# Altium PCB vp40_base_board.PcbDoc (part 5 of 5)
Units mil, origin at the board's own origin, x right, y up, seen from the top; angles counter-clockwise.
Board outline 8267.72 x 4330.71 mil, 4 copper layers (Top Layer, Internal Plane 1, Internal Plane 2, Bottom Layer), stack 30.635 mil thick; 531 components, 391 nets, 1969 pads, 1352 vias.
Unrouted connection lines stored in the file: 302.
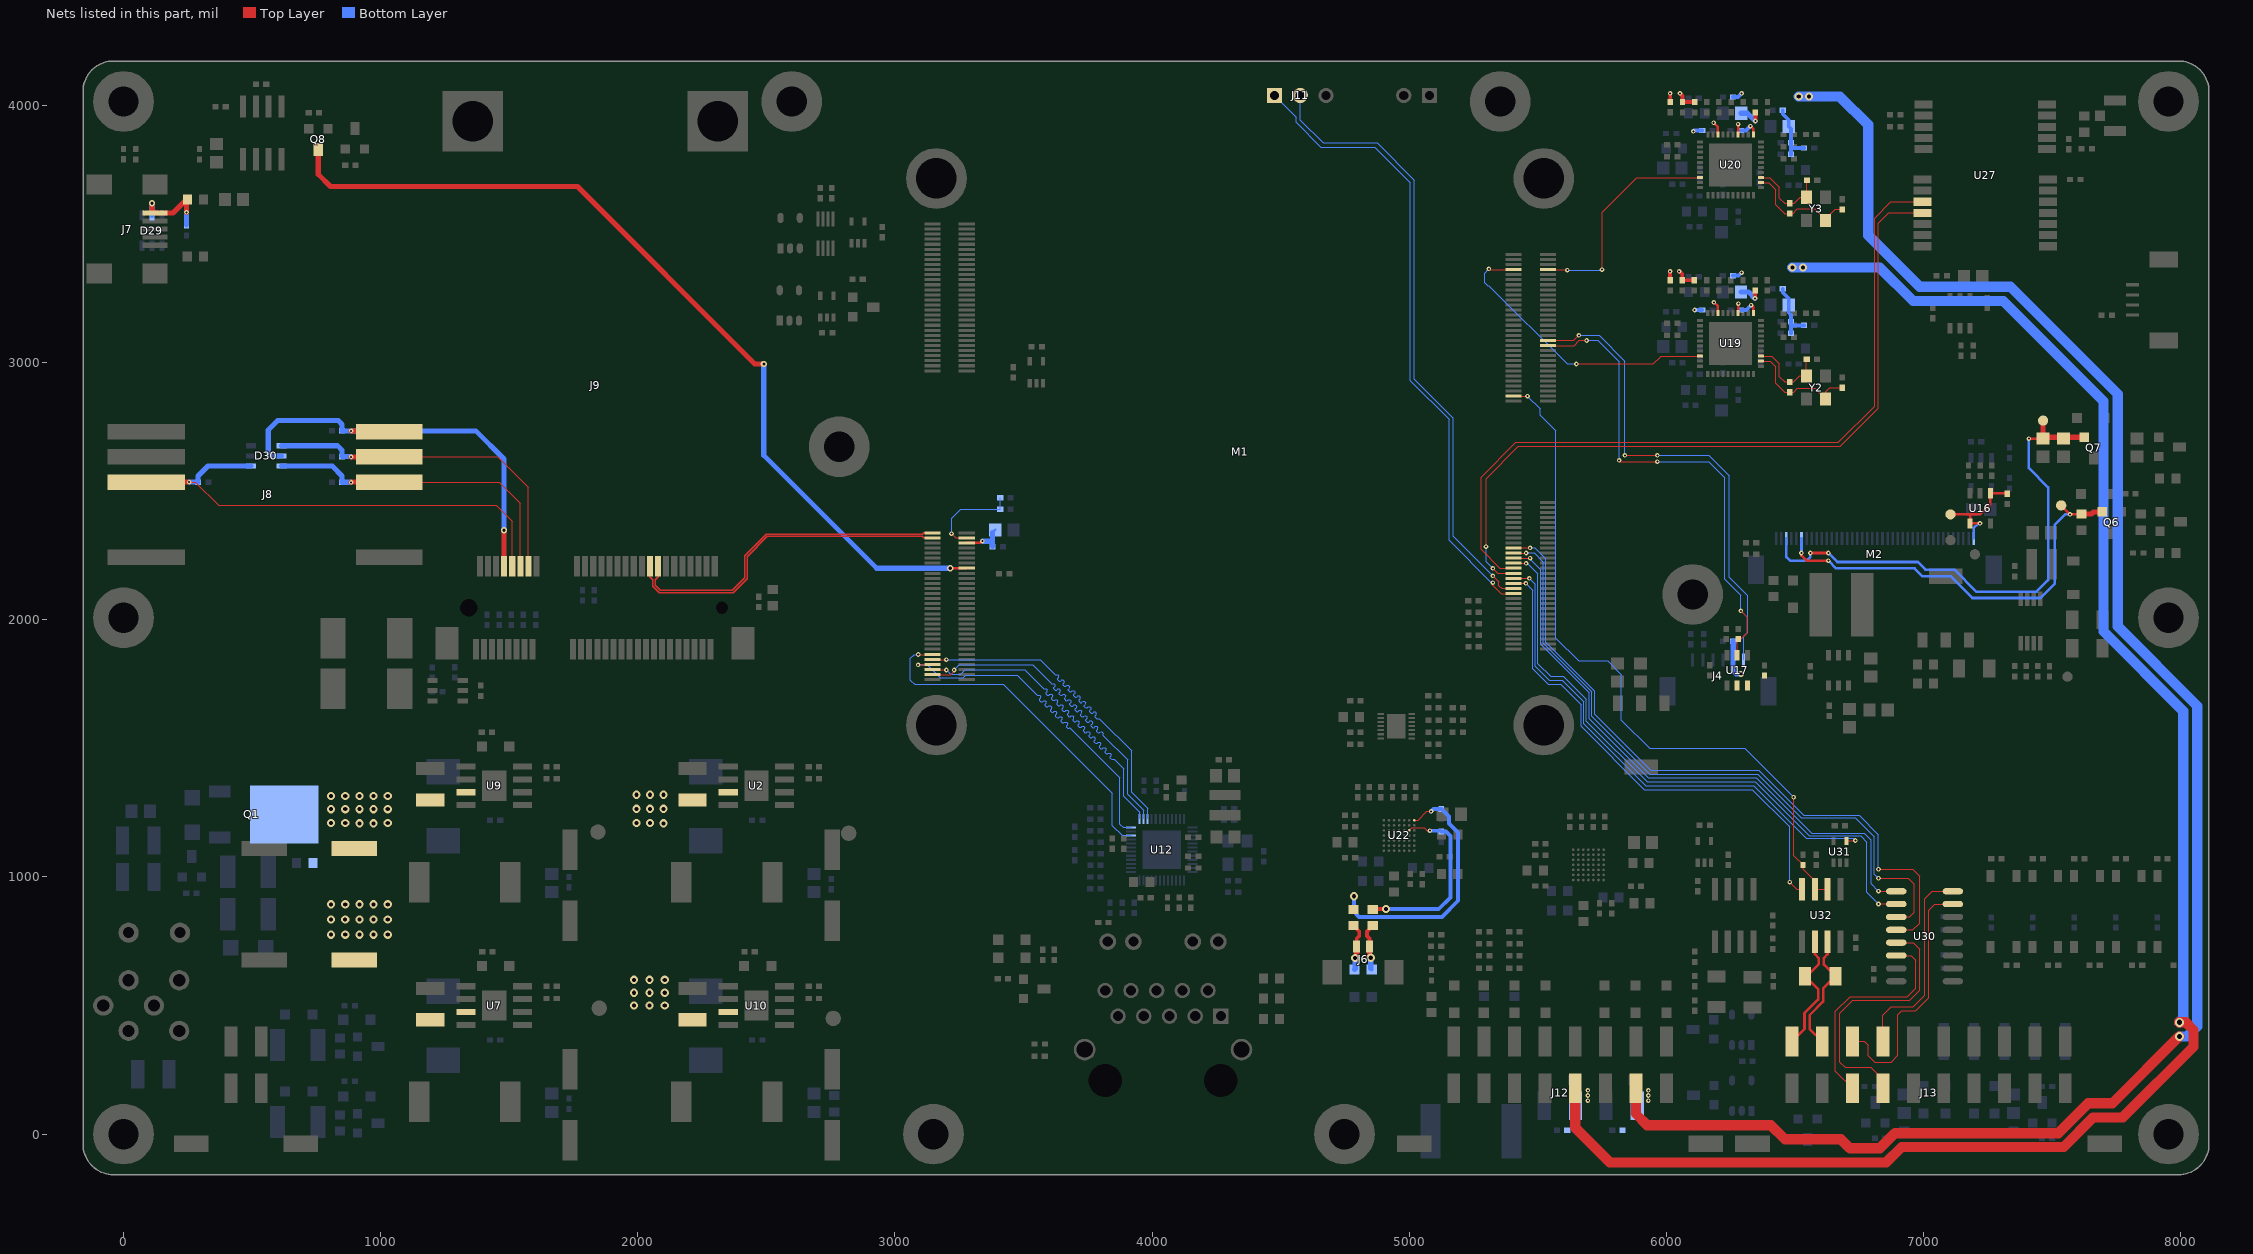
[diagram p7: the nets of this part, all layers, seen from the top]

## Via types
v1: diameter 18, hole 8, Top Layer to Bottom Layer, tented both sides, 481 vias
v2: diameter 18, hole 8, Top Layer to Bottom Layer, 376 vias
v3: diameter 32, hole 16, Top Layer to Bottom Layer, tented both sides, 202 vias
v4: diameter 24, hole 12, Top Layer to Bottom Layer, tented both sides, 182 vias
v5: diameter 24, hole 12, Top Layer to Bottom Layer, 65 vias
v6: diameter 32, hole 16, Top Layer to Bottom Layer, 34 vias
v7: diameter 32, hole 20, Top Layer to Bottom Layer, 7 vias
v8: diameter 32, hole 20, Top Layer to Bottom Layer, tented both sides, 3 vias
v9: diameter 35, hole 20, Top Layer to Bottom Layer, 2 vias

## Nets (pads, with @x,y where several pads share a name; then routed paths per layer and width w, separated by ;. In a path a pad name is that pad's centre, name@x,y a point inside that pad or via, vN(x,y) a via of type N, cw(c..) or ccw(c..) an arc to the next point about the centre after c; other vN are vias at no path point) (continued)
RGMII-TXD0: M1.C8 U12.36 | length 1368.2
  Top Layer w4.7: v1(3090,1825) 3147.44,1825 M1.C8@3145.67,1826.77
  Bottom Layer w4.7: v1(3090,1825) 3125.4,1825 3175.4,1775 3265,1775 3275,1785 3475,1785 3550,1710 3553.37,1706.63 3557.03,1706.63 3563.27,1706.63 3567.42,1702.48 3567.42,1696.24 3565.59,1694.41 3563.76,1692.58 3563.76,1686.34 3567.92,1682.18 3574.15,1682.18 3575.99,1684.01 3577.82,1685.85 3584.05,1685.85 3588.21,1681.69 3588.21,1675.45 3586.38,1673.62 3584.55,1671.79 3584.55,1665.55 3588.71,1661.39 3594.94,1661.39 3596.78,1663.22 3598.61,1665.06 3604.84,1665.06 3609,1660.9 3609,1654.66 3607.17,1652.83 3605.34,1651 3605.34,1644.76 3609.5,1640.6 3615.73,1640.6 3617.56,1642.44 3619.4,1644.27 3625.63,1644.27 3629.79,1640.11 3629.79,1633.87 3627.96,1632.04 3626.13,1630.21 3626.13,1623.97 3630.28,1619.82 3636.52,1619.82 3638.35,1621.65 3640.18,1623.48 3646.42,1623.48 3650.58,1619.32 3650.58,1613.08 3648.75,1611.25 3646.92,1609.42 3646.92,1603.18 3651.07,1599.03 3657.31,1599.03 3659.14,1600.86 3660.97,1602.69 3667.21,1602.69 3671.37,1598.53 3671.37,1592.3 3669.54,1590.46 3667.7,1588.63 3667.7,1582.4 3671.86,1578.24 3678.1,1578.24 3679.86,1580 3680,1580 3875,1385 3875,1205 3887.09,1192.91 U12.36@3918.3,1192.91
RGMII-TXD1: M1.C6 U12.37 | length 1364.3
  Top Layer w4.7: M1.C6@3145.67,1807.09 3147.76,1805 v1(3200,1805)
  Bottom Layer w4.7: v1(3200,1805) 3216.35,1788.65 3256.77,1788.65 3273.12,1805 3505,1805 3575,1735 3578.37,1731.63 3582.03,1731.63 3588.27,1731.63 3592.42,1727.48 3592.42,1721.24 3590.59,1719.41 3588.76,1717.58 3588.76,1711.34 3592.92,1707.18 3599.15,1707.18 3600.99,1709.01 3602.82,1710.85 3609.05,1710.85 3613.21,1706.69 3613.21,1700.45 3611.38,1698.62 3609.55,1696.79 3609.55,1690.55 3613.71,1686.39 3619.94,1686.39 3621.78,1688.22 3623.61,1690.06 3629.84,1690.06 3634,1685.9 3634,1679.66 3632.17,1677.83 3630.34,1676 3630.34,1669.76 3634.5,1665.6 3640.73,1665.6 3642.56,1667.44 3644.4,1669.27 3650.63,1669.27 3654.79,1665.11 3654.79,1658.87 3652.96,1657.04 3651.13,1655.21 3651.13,1648.97 3655.28,1644.82 3661.52,1644.82 3663.35,1646.65 3665.18,1648.48 3671.42,1648.48 3675.58,1644.32 3675.58,1638.08 3673.75,1636.25 3671.92,1634.42 3671.92,1628.18 3676.07,1624.03 3682.31,1624.03 3684.14,1625.86 3685.97,1627.69 3692.21,1627.69 3696.37,1623.53 3696.37,1617.3 3694.54,1615.46 3692.7,1613.63 3692.7,1607.4 3696.86,1603.24 3703.1,1603.24 3704.93,1605.07 3706.76,1606.9 3713,1606.9 3717.16,1602.74 3717.16,1596.51 3715.33,1594.67 3713.49,1592.84 3713.49,1586.61 3717.65,1582.45 3723.89,1582.45 3725.72,1584.28 3727.55,1586.11 3733.79,1586.11 3737.95,1581.95 3737.95,1575.72 3736.11,1573.89 3734.28,1572.05 3734.28,1565.82 3738.44,1561.66 3744.68,1561.66 3746.51,1563.49 3748.34,1565.32 3754.58,1565.32 3758.73,1561.16 3758.73,1554.93 3756.9,1553.1 3755.07,1551.27 3755.07,1545.03 3759.23,1540.87 3765.47,1540.87 3767.3,1542.7 3769.13,1544.53 3775.37,1544.53 3779.52,1540.38 3779.52,1534.14 3777.69,1532.31 3775.86,1530.48 3775.86,1524.24 3780.02,1520.08 3786.26,1520.08 3788.09,1521.91 3789.92,1523.74 3796.15,1523.74 3800.31,1519.59 3800.31,1513.35 3798.48,1511.52 3796.65,1509.69 3796.65,1503.45 3800.81,1499.29 3807.04,1499.29 3808.88,1501.12 3810.71,1502.96 3816.94,1502.96 3821.1,1498.8 3821.1,1492.56 3819.27,1490.73 3817.44,1488.9 3817.44,1482.66 3821.6,1478.5 3827.83,1478.5 3829.66,1480.34 3831.5,1482.17 3837.73,1482.17 3841.89,1478.01 3841.89,1471.77 3840.06,1469.94 3838.23,1468.11 3838.23,1461.87 3842.39,1457.72 3848.62,1457.72 3852.28,1457.72 3860,1450 3890,1420 3890,1313.3 3951.28,1252.02 U12.37@3951.28,1225.89
RGMII-TXD2: M1.C4 U12.38 | length 1366.2
  Top Layer w4.7: M1.C4@3145.67,1787.4 3217.4,1787.4 3230,1800 v1(3230,1805)
  Bottom Layer w4.7: v1(3230,1805) 3250,1825 3535,1825 3605,1755 3607.85,1752.15 3612.55,1752.15 3617.75,1752.15 3622.94,1746.96 3622.94,1741.76 3620.59,1739.41 3618.24,1737.06 3618.24,1731.86 3623.44,1726.66 3628.64,1726.66 3630.99,1729.01 3633.34,1731.36 3638.53,1731.36 3643.73,1726.17 3643.73,1720.97 3641.38,1718.62 3639.03,1716.27 3639.03,1711.07 3644.23,1705.87 3649.42,1705.87 3651.78,1708.22 3654.13,1710.58 3659.32,1710.58 3664.52,1705.38 3664.52,1700.18 3662.17,1697.83 3659.82,1695.48 3659.82,1690.28 3665.02,1685.08 3670.21,1685.08 3672.56,1687.44 3674.92,1689.79 3680.11,1689.79 3685.31,1684.59 3685.31,1679.39 3682.96,1677.04 3680.61,1674.69 3680.61,1669.49 3685.8,1664.3 3691,1664.3 3693.35,1666.65 3695.7,1669 3700.9,1669 3706.1,1663.8 3706.1,1658.6 3703.75,1656.25 3701.4,1653.9 3701.4,1648.7 3706.59,1643.51 3711.79,1643.51 3714.14,1645.86 3716.49,1648.21 3721.69,1648.21 3726.89,1643.01 3726.89,1637.81 3724.54,1635.46 3722.19,1633.11 3722.19,1627.92 3727.38,1622.72 3732.58,1622.72 3734.93,1625.07 3737.28,1627.42 3742.48,1627.42 3747.68,1622.22 3747.68,1617.03 3745.33,1614.67 3742.97,1612.32 3742.97,1607.13 3748.17,1601.93 3753.37,1601.93 3755.72,1604.28 3758.07,1606.63 3763.27,1606.63 3768.47,1601.43 3768.47,1596.24 3766.11,1593.89 3763.76,1591.53 3763.76,1586.34 3768.96,1581.14 3774.16,1581.14 3776.51,1583.49 3778.86,1585.84 3784.06,1585.84 3789.25,1580.65 3789.25,1575.45 3786.9,1573.1 3784.55,1570.75 3784.55,1565.55 3789.75,1560.35 3794.95,1560.35 3797.3,1562.7 3799.65,1565.05 3804.85,1565.05 3810.04,1559.86 3810.04,1554.66 3810.04,1549.96 3812.5,1547.5 3905,1455 3905,1322.02 3967.02,1260 U12.38@3967.02,1225.89
RGMII-TXD3: M1.C10 U12.39 | length 1363.3
  Top Layer w4.7: M1.C10@3145.67,1846.46 3147.13,1845 v1(3200,1845)
  Bottom Layer w4.7: v1(3200,1845) 3565,1845 3620,1790 3622.85,1787.15 3627.55,1787.15 3632.75,1787.15 3637.94,1781.96 3637.94,1776.76 3635.59,1774.41 3633.24,1772.06 3633.24,1766.86 3638.44,1761.66 3643.64,1761.66 3645.99,1764.01 3648.34,1766.36 3653.53,1766.36 3658.73,1761.17 3658.73,1755.97 3656.38,1753.62 3654.03,1751.27 3654.03,1746.07 3659.23,1740.87 3664.42,1740.87 3666.78,1743.22 3669.13,1745.58 3674.32,1745.58 3679.52,1740.38 3679.52,1735.18 3677.17,1732.83 3674.82,1730.48 3674.82,1725.28 3680.02,1720.08 3685.21,1720.08 3687.56,1722.44 3689.92,1724.79 3695.11,1724.79 3700.31,1719.59 3700.31,1714.39 3697.96,1712.04 3695.61,1709.69 3695.61,1704.49 3700.8,1699.3 3706,1699.3 3708.35,1701.65 3710.7,1704 3715.9,1704 3721.1,1698.8 3721.1,1693.6 3718.75,1691.25 3716.4,1688.9 3716.4,1683.7 3721.59,1678.51 3726.79,1678.51 3729.14,1680.86 3731.49,1683.21 3736.69,1683.21 3741.89,1678.01 3741.89,1672.81 3739.54,1670.46 3737.19,1668.11 3737.19,1662.92 3742.38,1657.72 3747.58,1657.72 3749.93,1660.07 3752.28,1662.42 3757.48,1662.42 3762.68,1657.22 3762.68,1652.03 3760.33,1649.67 3757.97,1647.32 3757.97,1642.13 3763.17,1636.93 3768.37,1636.93 3770.72,1639.28 3773.07,1641.63 3778.27,1641.63 3783.47,1636.43 3783.47,1631.24 3781.11,1628.89 3778.76,1626.53 3778.76,1621.34 3783.96,1616.14 3789.16,1616.14 3793.86,1616.14 3800,1610 3920,1490 3920,1330 3982.77,1267.23 U12.39@3982.77,1225.89
RGMII-TXEN: M1.C12 U12.34 | length 1360.5
  Top Layer w4.7: v1(3090.75,1865) 3144.53,1865 M1.C12@3145.67,1866.14 M1.C12@3146.81,1865
  Bottom Layer w4.7: v1(3090.75,1865) 3075,1865 3060,1850 3060,1765 3076.35,1748.65 3421.35,1748.65 3845,1325 3845,1200 3883.58,1161.42 U12.34@3918.3,1161.42
RS232A-RX: J13.8 U30.13 | length 1028.2
  Top Layer w4.7: J13.8@6842.52,178.35 6842.52,212.48 6795,260 6695.2,260 6675,280.2 6675,470 6725,520 6945.98,520 6985,559.02 6985,719.72 6960.24,744.49 U30.13@6894.17,744.49
RS232A-TX: J13.6 U30.14 | length 868.8
  Top Layer w4.7: J13.6@6724.41,178.35 6657.48,245.28 6657.48,477.48 6715,535 6937.44,535 6970,567.56 6970,676.25 6951.76,694.49 U30.14@6894.17,694.49
RS232B-RX: J13.7 U30.8 | length 792.9
  Top Layer w4.7: J13.7@6842.52,360.24 6842.52,462.52 6875,495 6959.87,495 7005,540.13 7005,914.49 7035,944.49 U30.8@7114.17,944.49
RS232B-TX: J13.5 U30.7 | length 993.2
  Top Layer w4.7: J13.5@6724.41,360.24 6769.76,360.24 6785,345 6785,305 6809.8,280.2 6874.38,280.2 6900,305.83 6900,465.13 6915,480.13 6970,480.13 7020,530.13 7020,870 7044.49,894.49 U30.7@7114.17,894.49
RS485_N: J13.3 R147.1 U32.7 | length 474.5
  Top Layer w10: J13.3@6606.3,360.24 6557.24,409.29 6557.24,462.24 6610,515 6610,566.69 R147.1@6657.48,614.17 6612.36,659.29 6612.36,684.72 6627.36,699.72 U32.7@6627.36,748.03
RS485_P: J13.1 R147.2 U32.6 | length 483.3
  Top Layer w10: J13.1@6488.19,360.24 6537.24,409.29 6537.24,470.53 6590,523.28 6590,563.54 R147.2@6539.37,614.17 6544.37,619.17 6551.54,619.17 6592.36,660 6592.36,684.72 6577.36,699.72 U32.6@6577.36,748.03
SIMCLK: C177.1 D30.6 J8.3 J9.12 | length 1249.1
  Top Layer w4.7: J8.3@1033.47,2535.43 1461.26,2535.43 1543.31,2453.39 J9.12@1543.31,2208.66
  Top Layer w20: v2(885,2535) 885,2535.43 J8.3@1033.47,2535.43
  Bottom Layer w20: D30.6@614.17,2598.43 811.57,2598.43 850.13,2559.87 C177.1@850.13,2535 v2(885,2535)
SIMDATA: C176.1 D30.1 J8.6 J9.10 | length 1942.9
  Top Layer w4.7: v2(255,2535.43) 279.57,2535.43 370,2445 1450,2445 1511.81,2383.19 J9.10@1511.81,2208.66
  Top Layer w20: J8.6@88.58,2535.43 v2(255,2535.43)
  Bottom Layer w20: v2(255,2535.43) 289.44,2535.43 C176.1@289.87,2535 289.87,2559.87 328.43,2598.43 D30.1@496.06,2598.43
SIMRST: C183.1 D30.4 J8.2 J9.14 | length 1348.8
  Top Layer w4.7: J8.2@1033.47,2633.86 1456.14,2633.86 1574.8,2515.2 J9.14@1574.8,2208.66
  Top Layer w20: v2(885,2633.86) J8.2@1033.47,2633.86
  Bottom Layer w20: D30.4@614.17,2677.17 832.83,2677.17 850.13,2659.87 C183.1@850.13,2635 883.86,2635 v2(885,2633.86)
SIMVCC: C178.1 D30.5 J8.1 J9.8 | length 1719.3
  Top Layer w20: v2(885,2735) 1030.75,2735 J8.1@1033.47,2732.28 ; v5(1480,2348.5) 1480.31,2348.19 J9.8@1480.31,2208.66
  Bottom Layer w20: D30.5@614.17,2637.8 575.2,2637.8 562.99,2650 562.99,2737.99 600,2775 835,2775 850.13,2759.87 C178.1@850.13,2735 1370,2735 1480,2625 v5(1480,2348.5)
SPK_N: L22.2 R104.2 U22.B3 | length 737.7
  Top Layer w3: U22.B3@5000,1181.11 5009.75,1190.85 5045,1190.85
  Top Layer w4.7: 5045,1190.85 5058.94,1190.85 5059.04,1190.74 ; 5059.15,1190.85 5070,1180 v1(5080,1180)
  Top Layer w15: L22.2@4858.27,874.02 4859.25,875 v3(4910,875)
  Bottom Layer w15: v3(4910,875) 5115,875 5160,920 5160,1160.36 5155,1165.36 5143,1177.35 R104.2@5125,1177.35 5122.35,1180 v1(5080,1180)
SPK_P: L23.2 R105.2 U22.A1 | length 1007.2
  Top Layer w4.7: U22.A1@5019.69,1220.48 5034.19,1220.48 5068.71,1255 v1(5085,1255)
  Bottom Layer w15: v3(4785,925) 4785,865 4805,845 5127.43,845 5190,907.57 5190,1172.79 5161.22,1201.57 5155,1207.78 5155,1235.05 5140.68,1249.37 5140.5,1249.37 R105.2@5125,1264.87 5094.87,1264.87 v1(5085,1255)
SPKF_N: D25.2 J6.1 L22.1 | length 188.2
  Top Layer w15: J6.1@4845,730 4845,760.73 4835.87,769.86 4835.87,788.62 L22.1@4858.27,811.02
  Top Layer w20: J6.1@4845,730 4845,691.3 v3(4850.21,686.09)
  Bottom Layer w15: D25.2@4850.21,643.89 D25.2@4854.33,639.76
  Bottom Layer w20: D25.2@4850.21,643.89 v3(4850.21,686.09)
SPKF_P: D26.2 J6.2 L23.1 | length 188.2
  Top Layer w15: L23.1@4783.46,811.02 4805.87,788.62 4805.87,770.81 4795.79,760.73 J6.2@4795.79,730
  Top Layer w20: v3(4789.87,685) 4795.79,690.91 J6.2@4795.79,730
  Bottom Layer w20: D26.2@4787.4,639.76 4789.87,642.24 v3(4789.87,685)
TOUCH-3V3: C70.1 C73.1 J4.2 U17.2 U17.3 | length 150.3
  Bottom Layer w20: J4.2@6259.84,1844.09 6259.84,1801.18 6271.02,1790 v5(6289.81,1790) ; J4.2@6260.28,1844.54 C73.1@6260.28,1917.32
TOUCH-PWR: M1.B23 R71.2 U17.5 | length 1890.7
  Top Layer w4.7: M1.B23@5539.37,3066.93 5642.21,3066.93 5661.89,3086.62 v2(5690,3086.62) ; v2(5816.5,2620) 5821.5,2615 v2(5965,2615) ; U17.5@6275.4,1862.2 6275.4,1920.88 R71.2@6279.53,1925.01 6290,1925.01 6314.69,1949.69 6314.69,2010.31 v2(6290,2035)
  Bottom Layer w4.7: v2(5690,3086.62) 5733.38,3086.62 5816.5,3003.5 v2(5816.5,2620) ; v2(5965,2615) 6164.59,2615 6227.82,2551.77 6227.82,2157.18 6290,2095 v2(6290,2035)
TOUCH-RST: J4.1 M1.B25 | length 1905.9
  Top Layer w4.7: M1.B25@5539.37,3086.61 5640.31,3086.61 v2(5660,3106.3) ; v2(5838.94,2640) v2(5965,2640)
  Bottom Layer w4.7: v2(5660,3106.3) 5738.7,3106.3 5838.94,3006.06 v2(5838.94,2640) ; v2(5965,2640) 6164.86,2640 6245,2559.86 6245,2165 6315,2095 6315,1950 6299.21,1934.21 J4.1@6299.21,1844.09
UART1-RXD: J11.2 M1.A26 | length 2410.3
  Top Layer w4.7: v2(5325,2171.3) 5348.94,2147.36 5348.94,2133.39 5360.27,2122.05 M1.A26@5405.51,2122.05
  Bottom Layer w4.7: J11.2@4576.38,4039.37 4576.38,3943.62 4665,3855 4875,3855 5020,3710 5020,2935 5170,2785 5170,2326.3 v2(5325,2171.3)
UART1-TXD: J11.1 M1.A24 | length 2475.9
  Top Layer w4.7: v2(5325,2145) 5325,2135 5357.64,2102.36 M1.A24@5405.51,2102.36
  Bottom Layer w4.7: J11.1@4476.38,4039.37 4476.38,4038.62 4560,3955 4560,3935 4656.8,3838.2 4866.8,3838.2 5005,3700 5005,2930 5155,2780 5155,2310 5320,2145 v2(5325,2145)
UART2-RTS: M1.B4 R148.1 U32.2 U32.3 | length 2766.9
  Top Layer w4.7: M1.B4@5405.51,2870.08 v2(5460,2870.08) ; v2(6495,1310) 6495,1083.3 R148.1@6531.5,1046.8 6531.5,1030.76 6577.36,984.89 U32.3@6577.36,952.76 U32.2@6627.36,952.76
  Bottom Layer w4.7: v2(5460,2870.08) 5508.95,2821.13 5508.95,2796.05 5570,2735 5570,1929.4 5659.4,1840 5771.18,1840 5825,1786.18 5825,1610 5935,1500 6305,1500 v2(6495,1310)
UART2-RXD: M1.A30 U31.4 | length 2022.6
  Top Layer w4.7: M1.A30@5405.51,2161.42 v2(5467.37,2161.42) ; U31.4@6700.8,1140.12 v2@6735,1140.12
  Bottom Layer w4.7: v2(5467.37,2161.42) 5490,2138.79 5490,1820 5545,1765 5595,1765 5679.4,1680.6 5679.4,1595.6 5920,1355 6340,1355 6545,1150 6726.73,1150 v2(6735,1141.73)
UART2-TXD: M1.A28 U32.4 | length 2004
  Top Layer w4.7: M1.A28@5405.51,2141.73 v2(5453.94,2141.73) ; v2(6480,980) 6507.24,952.76 U32.4@6527.36,952.76 U32.4@6527.36,987.64
  Bottom Layer w4.7: v2(5453.94,2141.73) 5480,2115.67 5480,1810 5540,1750 5590,1750 5669.7,1670.3 5669.7,1585.3 5915,1340 6335,1340 6480,1195 v2(6480,980)
UART3-RXD: M1.A34 U27.20 | length 3025.4
  Top Layer w4.7: M1.A34@5405.51,2200.79 5352.87,2200.79 5280,2273.66 5280,2555 5415,2690 6669.21,2690 6810,2830.79 6810,3562.48 6873.5,3625.98 U27.20@6996.18,3625.98
UART3-TXD: M1.A32 U27.21 | length 2994.9
  Top Layer w4.7: v2(5298.7,2285) 5298.7,2548.7 5425,2675 6676.21,2675 6825,2823.79 6825,3542.88 6864.8,3582.68 U27.21@6996.18,3582.68 ; v2(5325,2200) 5343.9,2181.1 M1.A32@5405.51,2181.1
  Bottom Layer w4.7: v2(5298.7,2285) 5298.7,2226.3 v2(5325,2200)
UART4-RXD: M1.A42 U30.12 | length 2713.9
  Top Layer w4.7: M1.A42@5405.51,2279.53 5469.53,2279.53 v2(5470,2280) ; v2(6825,1030) 6958.15,1030 6985,1003.15 6985,821.02 6958.46,794.49 U30.12@6894.17,794.49
  Bottom Layer w4.7: v2(5470,2280) 5488.62,2280 5531.2,2237.42 5531.2,1913.33 5720,1724.53 5720,1635 5940,1415 6360,1415 6535,1240 6750,1240 6825,1165 v2(6825,1030)
UART4-TXD: M1.A40 U30.11 | length 2605.4
  Top Layer w4.7: M1.A40@5405.51,2259.84 5454.84,2259.84 v2(5455,2260) ; v2(6825,995) 6941.25,995 6965,971.25 6965,863.24 6946.25,844.49 U30.11@6894.17,844.49
  Bottom Layer w4.7: v2(5455,2260) 5485.47,2260 5521.5,2223.97 5521.5,1909.31 5710,1720.81 5710,1625 5935,1400 6355,1400 6525,1230 6735,1230 6808.65,1156.35 6808.65,1011.35 v2(6825,995)
UART5-RXD: M1.A38 U30.9 | length 2361
  Top Layer w4.7: M1.A38@5405.51,2240.16 5469.84,2240.16 v2(5470,2240) ; v2(6825,945) 6890.96,945 6892.31,946.35 U30.9@6894.17,944.49
  Bottom Layer w4.7: v2(5470,2240) 5467.53,2240 5467.45,2239.92 5511.8,2195.57 5511.8,1905.29 5700,1717.09 5700,1615 5930,1385 6350,1385 6565,1170 6770,1170 6795,1145 6795,975 v2(6825,945)
UART5-TXD: M1.A36 U30.10 | length 2398.5
  Top Layer w4.7: M1.A36@5415.04,2220 v2(5455,2220) ; v2(6825,895) 6893.66,895 U30.10@6894.17,894.49
  Bottom Layer w4.7: v2(5455,2220) 5459.05,2220 v2@5460,2220.95 ; v2@5459.53,2220.47 5500,2180 5500,1830 5550,1780 5600,1780 5689.1,1690.9 5689.1,1605.9 5925,1370 6345,1370 6555,1160 6755.39,1160 6780,1135.39 6780,940 v2(6825,895)
USB-H1-OC: M1.C57 R29.1 R30.1 | length 375.6
  Top Layer w4.7: v2(3220,2335) 3236.1,2318.9 M1.C57@3279.53,2318.9
  Bottom Layer w4.7: v2(3220,2335) 3220,2395 3255,2430 R30.1@3409.87,2430 R29.1@3409.87,2475
USB-H1-VBUS: C32.1 M1.C55 R31.1 | length 171.5
  Top Layer w10: M1.C55@3279.53,2299.21 3333.39,2299.21 v1(3340,2305.83)
  Bottom Layer w10: C32.1@3379.87,2339.87 C32.1@3390,2350
  Bottom Layer w20: v1(3340,2305.83) 3379.05,2305.83 ; R31.1@3379.87,2285 C32.1@3379.87,2339.87
USB-HOST_N: J9.36 M1.C58 | length 1322.7
  Top Layer w5.3: J9.36@2047.24,2208.66 2047.24,2166.64 2058.49,2155.39 2058.49,2131.27 2083.76,2106 2371,2106 2425,2160 2425,2246 2503.24,2324.24 3106.18,2324.24 3111.52,2318.9 M1.C58@3145.67,2318.9
USB-HOST_P: J9.38 M1.C60 | length 1307.8
  Top Layer w5.3: J9.38@2078.74,2208.66 2078.74,2166.64 2067.49,2155.39 2067.49,2135 2087.49,2115 2367.27,2115 2416,2163.73 2416,2249.73 2499.51,2333.24 3106.18,2333.24 3111.52,2338.58 M1.C60@3145.67,2338.58
USB-OTG-VBUS: M1.C45 Q8.3 | length 3460.6
  Top Layer w10: v5(3215,2200.79) M1.C45@3279.53,2200.79
  Top Layer w20: Q8.3@757.28,3829.45 757.28,3732.72 805,3685 1765,3685 2455,2995 v5(2490,2995)
  Bottom Layer w20: v5(2490,2995) 2490,2640 2929.21,2200.79 v5@3213.2,2200.79 ; v5@3214.1,2200.79 v5(3215,2200.79)
VADC1-INT: M1.B54 U19.38 | length 1138.6
  Top Layer w4.7: v1(5310,3365) 5312.8,3362.2 M1.B54@5405.51,3362.2 ; v1(5650,2995) 5949.41,2995 5980,3025.59 U19.38@6131.45,3025.59
  Bottom Layer w4.7: v1(5310,3365) 5293.65,3348.65 5293.65,3311.35 5305,3300 5310,3300 5615,2995 v1(5650,2995)
VADC1-X1: C103.2 R83.2 U19.13 Y2.3 | length 322.6
  Top Layer w4.7: U19.13@6367.67,3025.59 6409.41,3025.59 6440,2995 6440,2945 6459.61,2925.39 R83.2@6479.87,2925.39 6495.39,2925.39 6518.83,2948.83 Y2.3@6544.84,2948.83 6544.84,3012.19 C103.2@6545.92,3013.27
VADC1-X2: C104.2 R83.1 U19.12 Y2.1 | length 463
  Top Layer w4.7: U19.12@6367.67,3005.91 6404.09,3005.91 6425,2985 6425,2920 6459.61,2885.39 R83.1@6479.87,2885.39 6495.39,2885.39 6510,2900 6577.91,2900 Y2.1@6619.64,2858.27 6619.64,2887.28 6635.21,2902.85 C104.2@6683.91,2902.85
VADC2-INT: M1.B53 U20.38 | length 872.9
  Top Layer w4.7: M1.B53@5539.37,3362.2 5612.83,3362.2 v1(5615,3360) ; v1(5750,3362.21) 5750,3585 5885.2,3720.2 U20.38@6131.57,3720.2
  Bottom Layer w4.7: v1(5615,3360) 5747.79,3360 v1(5750,3362.21)
VADC2-X1: C134.2 R92.2 U20.13 Y3.3 | length 321.2
  Top Layer w4.7: U20.13@6367.8,3720.2 6402.69,3720.2 6440,3682.89 6440,3640 6460,3620 R92.2@6480,3620 6496.48,3620 6519.92,3643.44 Y3.3@6544.96,3643.44 6546.74,3645.22 C134.2@6546.74,3710.36
VADC2-X2: C133.2 R92.1 U20.12 Y3.1 | length 447.1
  Top Layer w4.7: U20.12@6367.8,3700.52 6397.32,3700.52 6425,3672.84 6425,3615 6460,3580 R92.1@6480,3580 6491.61,3580 6509.69,3598.08 6576.61,3598.08 Y3.1@6619.76,3554.92 ; Y3.1@6619.76,3552.88 Y3.1@6619.76,3554.92 ; C133.2@6684.72,3596 6657.48,3596 6619.76,3558.28 Y3.1@6619.76,3554.92
VBAT: C5.1 C6.1 C7.1 C10.1 C15.1 C22.1 C23.1 Q1.3 U2.7 U7.7 U9.7 U10.7
  other v3: 1985,500 2045,500 2105,500 1985,550 2045,550 2105,550 1985,600 2045,600 2105,600 807.09,775.59 862.2,775.59 917.32,775.59 972.44,775.59 1027.56,775.59 807.09,834.46 862.02,834.65 917.32,834.46 972.44,834.65 1027.56,834.46 807.09,893.7 862.2,893.7 917.32,893.7 972.44,893.7 1027.56,893.7 917.32,1208.66 972.44,1208.66 2100,1208.66 807.09,1209.45 862.2,1209.45 1027.56,1209.45 1995,1210 2047.24,1210 807.09,1263.78 862.2,1263.78 917.32,1263.78 972.44,1263.78 1027.56,1263.78 1995,1265 2047.24,1265 2100,1265 807.09,1314.96 862.2,1314.96 917.32,1314.96 972.44,1314.96 1027.56,1314.96 1995,1320 2047.24,1320 2100,1320
VBUSF: C171.2 D29.5 J7.1 L29.2 | length 338.6
  Top Layer w20: v5(110.63,3620) 110.63,3594.09 J7.1@122.05,3582.68 192.68,3582.68 245,3635 L29.2@248.5,3635 245,3631.5 v2(245,3585)
  Bottom Layer w20: D29.5@110.63,3573.11 v5(110.63,3620) ; C171.2@245,3534.87 v2(245,3585)
VCOM: C68.1 M2.1 pad.@7105,2410 U16.1 U16.4 | length 427.5
  Top Layer w10: pad.@7105,2410 7181.1,2410 ; v1(7220,2375) 7182.09,2375 U16.4@7181.1,2374.02 7181.1,2410 ; C68.1@7325,2490.13 7323,2492.13 U16.1@7259.84,2492.13 7259.84,2449.84 7220,2410 7181.1,2410
  Bottom Layer w10: M2.1@7194.88,2316.54 7194.88,2356.3 7213.58,2375 v1(7220,2375)
VGH: C54.1 C55.1 M2.38 pad.@7465,2775 Q7.3 | length 2066.6
  Top Layer w10: v1(6560,2260) v1(6630,2260) ; v1(7410,2705) C55.1@7465,2705
  Top Layer w20: pad.@7465,2775 C55.1@7465,2705 7470,2710 Q7.3@7625,2710
  Bottom Layer w10: M2.38@6466.54,2316.54 6466.54,2244.53 6481.06,2230 6545,2230 6560,2245 v1(6560,2260) ; v1(6630,2260) 6665,2225 6977.91,2225 7007.91,2195 7120,2195 7205,2110 7440,2110 7485,2155 7485,2515 7410,2590 v1(7410,2705)
VGL: C52.2 M2.35 pad.@7535.43,2445 Q6.3 | length 1627
  Top Layer w10: v1(6525,2260) 6525,2250 6545,2230 v1(6630,2230) ; pad.@7535.43,2445 7570,2410.43 v1(7570,2410) 7571.5,2411.5 C52.2@7615,2411.5
  Top Layer w20: C52.2@7615,2411.5 7652.92,2411.5 7661.43,2420 Q6.3@7695,2420
  Bottom Layer w10: v1@6525.59,2260 M2.35@6525.59,2316.54 ; v1(6630,2230) 6660,2200 6965,2200 6995,2170 7105,2170 7190,2085 7455,2085 7510,2140 7510,2368.82 7551.18,2410 v1(7570,2410)
VGND1: C82.2 C83.2 C87.2 C88.2 C96.1 C98.1 C211.2 C213.2 J12.10 R77.1 R84.1 U19.21 U19.24 U19.28 | length 7361.3
  Top Layer w10: v1(6185,3235) 6200.35,3219.65 U19.28@6200.35,3192.91 ; U19.24@6279.09,3192.91 6279.09,3229.09 v1(6280,3230) ; v1(6330,3224.06) 6338.14,3215.92 U19.21@6338.14,3192.91
  Top Layer w15: R84.1@6014.62,3320.8 6014.62,3354.62 v1(6015,3355) ; v1(6050,3355) 6051.86,3355 6061.86,3345 C87.2@6061.86,3320.55 C88.2@6109.1,3320.55 ; v1(6345,3250) 6345.33,3250.33 R77.1@6345.33,3280.55
  Top Layer w40: J12.10@5645.67,178.35 5645.67,24.33 5780,-110 6855,-110 6915,-50 7545,-50 7660,65 7775,65 8050,340 8050,405 8020,435 v9(7995,435)
  Bottom Layer w15: v1(6110,3205) C98.1@6139.87,3205 ; C82.2@6259.59,3338.58 6281.45,3338.58 v1(6292.87,3350) ; C96.1@6290.13,3205 6310.94,3205 v1(6330,3224.06)
  Bottom Layer w20: C83.2@6290.9,3275.59 6319.41,3275.59 v1(6345,3250)
  Bottom Layer w40: v6(6490,3370) v6(6531.5,3370) 6830,3370 6960,3240 7310,3240 7700,2850 7700,1955 8010,1645 8010,450 v9(7995,435)
  other v2: 5695,130 5695,150 5695,170
VGND2: C112.2 C113.2 C117.2 C118.2 C126.1 C128.1 C214.2 C216.2 J12.14 R87.1 R93.1 U20.21 U20.24 U20.28 | length 7560.8
  Top Layer w10: v1(6183.84,3933.2) 6200.47,3916.57 U20.28@6200.47,3887.53 ; v1(6279.09,3927.76) 6279.21,3927.64 U20.24@6279.21,3887.53 ; v1(6326.94,3920) 6338.27,3908.67 U20.21@6338.27,3887.53
  Top Layer w15: R93.1@6015.43,4013.95 v1@6015.43,4046.83 ; v1(6053.11,4047.26) 6062.68,4037.7 C118.2@6062.68,4013.7 C117.2@6109.92,4013.7 ; v1(6346.14,3940) R87.1@6346.14,3973.7
  Top Layer w40: J12.14@5881.89,178.35 5881.89,78.11 5925,35 6406.38,35 6461.38,-20 6679,-20 6714,-55 6830,-55 6888.94,3.94 7523.94,3.94 7640,120 7735,120 v9(7995,380)
  Bottom Layer w15: v1(6105,3900) 6108.2,3903.2 C128.1@6139.56,3903.2 ; C112.2@6259.72,4033.2 6278.8,4033.2 v1(6292.87,4047.26) ; C126.1@6289.81,3903.2 6310.14,3903.2 v1(6326.94,3920)
  Bottom Layer w20: C113.2@6291.02,3970.2 6315.94,3970.2 v1(6346.14,3940)
  Bottom Layer w40: v6(6515.13,4035) 6675,4035 6785,3925 6785,3495 6985,3295 7338.31,3295 7755,2878.31 7755,1975 8065,1665 8065,420 8025,380 v9(7995,380)
  other v1: 6015,4047.26
  other v2: 5930,130 5930,150 5930,170
  other v6: 6555,4035
VPLLGND1: C80.2 C81.2 C95.1 C97.1 R85.1 | length 235.7
  Bottom Layer w15: C80.2@6452.5,3287.4 6452.5,3272.5 6475.94,3249.06 C81.2@6475.94,3224.41 6475.94,3194.19 6485.13,3185 C97.1@6485.13,3160 6485.13,3145 ; C95.1@6485.13,3115 6485.13,3145 ; R85.1@6534.87,3145 6485.13,3145
VPLLGND2: C110.2 C111.2 C125.1 C127.1 R94.1 | length 235.2
  Bottom Layer w15: C110.2@6452.63,3982.02 6452.63,3967.37 6476.06,3943.94 C111.2@6476.06,3919.02 6485.13,3909.96 C127.1@6485.13,3855 6485.13,3835 ; C125.1@6485.13,3810 6485.13,3835 ; R94.1@6534.87,3835 6485.13,3835
pads on no net: D29.6 D30.3 J3.H1 J3.H2 J8. J8.5 J9.6 J9.7 J9.11 J9.13 J9.16 J9.17 J9.19 J9.23 J9.25 J9.28 J9.30 J9.31 J9.32 J9.33 J9.44 J9.45 J9.46 J9.47 J9.48 J9.49 J9.51 J9.@1358.27,3938.98 J9.@2311.02,3938.98 J9.H1 J9.H2 J12.9 J13.18 M1. M1.A14 M1.A15 M1.A46 M1.A54 M1.B1 M1.B3 M1.B5 M1.B6 M1.B7 M1.B8 M1.B9 M1.B10 M1.B11 M1.B12 M1.B13 M1.B14 M1.B15 M1.B16 M1.B17 M1.B18 M1.B19 M1.B20 M1.B21 M1.B22 M1.B24 M1.B26 M1.B28 M1.C1 M1.C3 M1.C5 M1.C7 M1.C9 M1.C11 M1.C13 M1.C15 M1.C17 M1.C19 M1.C21 M1.C23 M1.C25 M1.C26 M1.C27 M1.C29 M1.C31 M1.C33 M1.C35 M1.C40 M1.C42 M1.C44 M1.C46 M1.C48 M1.C50 M1.C59 M1.D19 M1.D34 M1.D36 M1.D38 M1.D40 M1.D42 M1.D44 M1.D46 M1.D48 M2.4 M2.5 M2.6 M2.23 M2.24 M2.26 M2.27 M2.28 M2.33 M2.34 M2.36 U2.2 U2.3 U2.5 U4.1 U6.1 U7.2 U7.3 U8.3 U9.2 U9.3 U10.2 U10.3 U12.22 U12.42 U12.43 U12.45 U12.46 U19.2 U20.2 U22.A4 U22.A5 U22.D5 U22.E3 U22.E4 U22.E5 U22.E6 U22.E7 U22.F4 U22.F5 U22.F6 U22.F7 U22.G1 U22.G6 U23.A1 U23.A4 U23.B2 U23.B3 U23.C3 U23.C4 U23.D4 U23.D5 U23.E3 U23.E4 U23.E5 U23.E6 U23.E7 U23.F4 U23.F5 U23.F6 U23.F7 U23.G1 U23.G6 U24.2 U24.8 U27.1 U27.2 U27.3 U27.4 U27.5 U27.6 U27.16 U27.17 U27.18 U27.19 U27.22 U37.1 U39.1 Y1.2 Y1.4 Y2.2 Y2.4 Y3.2 Y3.4
copper on no net:
  other v1: 7420,3917.32

## Polygon pours and split planes (outlines as drawn)
BL-LED+ on Bottom Layer "Top Layer-No Net" (solid, remove dead copper, pour order 75): 6427.17,2345 6445.13,2345 6450,2345 6455,2340 6455,2195 6450,2190 6419.96,2190 6414.69,2195.28 6414.69,2339.69 6420,2345
NetD3_1 on Bottom Layer "Top Layer-No Net" (solid, remove dead copper, pour order 60): 523.62,929.13 594.49,929.13 602.36,929.13 610.24,921.26 610.24,692.91 602.36,685.04 511.81,685.04 503.94,692.91 503.94,921.26 511.81,929.13
NetQ2_2 on Bottom Layer "Top Layer-No Net" (solid, remove dead copper, pour order 59): 20 vertices, not listed, extent 271.65,787.4 444.88,1035.43
NetD2_2 on Bottom Layer "Top Layer-No Net" (solid, remove dead copper, pour order 58): 18 vertices, not listed, extent 208.66,940.94 437.01,1220.47
NetC2_1 on Bottom Layer "Top Layer-No Net" (solid, remove dead copper, pour order 57): 31 vertices, not listed, extent -35.43,724.41 437.01,1374.2
PWRIN on Bottom Layer "Top Layer-No Net" (solid, remove dead copper, pour order 56): -15.75,452.76 19.68,452.76 70.87,452.76 98.43,425.2 98.43,232.28 98.43,165.35 86.61,153.54 -47.24,153.54 -59.06,165.35 -59.06,429.13 -35.43,452.76
VBAT on Bottom Layer "Top Layer-No Net" (solid, remove dead copper, pour order 63): 606.3,1374.2 606.49,1374.02 944.88,1374.02 1035.43,1374.02 1055.12,1354.33 1055.12,1043.31 1035.43,1023.62 720.47,1023.62 708.66,1035.43 708.66,1098.43 692.91,1114.17 492.13,1114.17 472.44,1133.86 472.44,1354.33 492.13,1374.02
NetC21_1 on Bottom Layer "Top Layer-No Net" (solid, remove dead copper, pour order 66): 1244.09,1244.09 1389.76,1244.09 1425.2,1244.09 1433.07,1236.22 1433.07,881.89 1413.39,862.2 1122.05,862.2 1098.42,885.83 1098.43,1228.35 1114.17,1244.09
NetC14_1 on Bottom Layer "Top Layer-No Net" (solid, remove dead copper, pour order 77): 1265,390 1400,390 1430,390 1435,385 1435,40 1415,20 1120,20 1098.42,41.57 1098.42,368.43 1120,390
NetD1_1 on Bottom Layer "Top Layer-No Net" (solid, remove dead copper, pour order 81): 33 vertices, not listed, extent -35,550 305,850
NetC9_1 on Bottom Layer "Top Layer-No Net" (solid, remove dead copper, pour order 85): 2250,1245 2430,1245 2441.22,1245 2450,1236.22 2450,880 2435,865 2150,865 2135,880 2135,1230 2150,1245
NetC20_1 on Bottom Layer "Top Layer-No Net" (solid, remove dead copper, pour order 91): 2265,390 2440,390 2450,380 2450,40 2430,20 2125,20 2105,40 2105,370 2125,390
LCD-2V5 on Bottom Layer "Top Layer-No Net" (solid, remove dead copper, pour order 95): 19 vertices, not listed, extent 7150,2280 7220,2540
P3V3 on Bottom Layer "Top Layer-No Net" (solid, remove dead copper, pour order 96): 7170,2600 7195,2600 7195,2600.12 7199.88,2605 7199.88,2715 7194.88,2720 7115,2720 7110,2715 7110,2605 7115,2600
12V-CAM on Bottom Layer "Top Layer-No Net 1" (solid, remove dead copper, pour order 103): 5095,-130 4978.74,-130 4935,-130 4915,-110 4915,188.66 4935,208.66 4936.34,210 5095,210
CAM1-PWR on Bottom Layer "Top Layer-No Net 1" (solid, remove dead copper, pour order 104): 19 vertices, not listed, extent 5340,-130 5585,250
CAM1-PWR on Bottom Layer "Top Layer-No Net 1" (solid, remove dead copper, pour order 106): 18 vertices, not listed, extent 5530,-130 5816.5,250
VGND1 on Bottom Layer "Top Layer-No Net 1" (solid, remove dead copper, pour order 108): 5645,180 5700,180 5705,175 5710,170 5710,5 5700,-5 5610,-5 5605,0 5605,170 5615,180
VGND2 on Bottom Layer "Top Layer-No Net 1" (solid, remove dead copper, pour order 109): 5880.2,180 5925,180 5930,180 5940,170 5940,5 5930,-5 5838.94,-5 5830,3.94 5830,35 5840,45 5840,82.68 5840,110 5840,175 5845,180
NetD34_1 on Bottom Layer "Top Layer-No Net 1" (solid, remove dead copper, pour order 113): 7078.3,110 7105,110 7125,110 7130,105 7130,70.6 7130,55 7125,50 7060,50 7050,50 7045,55 7045,95 7060,110
NetD37_1 on Bottom Layer "Top Layer-No Net 1" (solid, remove dead copper, pour order 115): 7165,110 7220,110 7225,105 7225,78.94 7225,55 7220,50 7150,50 7145,55 7145,105 7150,110
VGND1 on Top Layer "Top Layer-No Net 1" (solid, remove dead copper, pour order 68): 5633.72,180 5693.65,180 5705,180 5710,175 5710,120 5705,115 5610,115 5605,120 5605,175.31 5609.69,180
P3V3 on Top Layer "Top Layer-No Net 1" (solid, remove dead copper, pour order 79): 1310,1700 1360,1700 1380,1720 1456.14,1720 1605,1720 1615,1710 1615,1630 1603.12,1618.12 1285.97,1618.12 1279.09,1625 1279.09,1691.69 1287.4,1700
CELL-3V3 on Top Layer "Top Layer-No Net 1" (solid, remove dead copper, pour order 76): 19 vertices, not listed, extent 915,1618.12 1235,2140
OTGVBUS on Top Layer "Top Layer-No Net 1" (solid, remove dead copper, pour order 73): 25 vertices, not listed, extent 275,3595 480,3845
OTG-SH-GND on Top Layer "Top Layer-No Net 1" (solid, remove dead copper, pour order 70): 20 vertices, not listed, extent -120,3263.78 192.68,3795
NetD19_2 on Top Layer "Top Layer-No Net" (solid, pour order 94): 25 vertices, not listed, extent 7450,2045 7820,2280
P3V3 on Top Layer "Top Layer-No Net" (solid, remove dead copper, pour order 92): 7405,2045 7440,2045 7440,2127.05 7440,2135.94 7454.72,2150.67 7454.72,2450.28 7445,2460 7385,2460 7380,2455 7380,2156.73 7395,2141.73 7395,2045
AVDD on Top Layer "Top Layer-No Net" (solid, remove dead copper, pour order 90): 33 vertices, not listed, extent 7005,1755 7180,2235
P5V0 on Top Layer "Top Layer-No Net" (solid, remove dead copper, pour order 86): 6736.46,2200.79 6807.09,2200.79 6874.21,2200.79 6885,2190 6885,1835 6875,1825 6705,1825 6695,1835 6695,1915 6705,1925 6705,2190.79 6715,2200.79
NetD20_1 on Top Layer "Top Layer-No Net" (solid, remove dead copper, pour order 84): 30 vertices, not listed, extent 6459.61,1835 6675,2200.79
BL-LED+ on Top Layer "Top Layer-No Net" (solid, remove dead copper, pour order 80): 6425,2275 6456.19,2275 6456.19,2209.6 6465,2200.79 6525,2200.79 6525,2120 6392.57,2120 6392.57,2187.88 6414.69,2210 6414.69,2274.69 6415,2275
ETH-SH-GND on Top Layer "Top Layer-No Net" (solid, remove dead copper, pour order 74): 3765,400 4110,400 4385,400 4400,385 4400,290 4385,275 4315,275 4300,290 3775,290 3760,275 3715,275 3585,275 3575,285 3575,390 3585,400
P3V3 on Top Layer "Top Layer-No Net" (solid, remove dead copper, pour order 71): 3110,3115 3345,3115 3360,3115 3370,3105 3370,3050 3360,3040 3065,3040 3055,3050 3055,3105 3065,3115
CPU-3V3 on Top Layer "Top Layer-No Net" (solid, remove dead copper, pour order 67): 3095,3030 3360,3030 3370,3020 3370,2895 3360,2885 3065,2885 3055,2895 3055,3020 3065,3030
GND on Top Layer "Top Layer-No Net" (solid, remove dead copper, pour order 65): 29 vertices, not listed, extent -125,270 740,1350
PWRIN on Top Layer "Top Layer-No Net" (solid, remove dead copper, pour order 62): 17 vertices, not listed, extent -59.06,55.12 456.69,452.76
VBAT on Top Layer "Top Layer-No Net" (solid, remove dead copper, pour order 61): 30 vertices, not listed, extent 767.72,307.09 1377.95,1350.39
NetC21_1 on Top Layer "Top Layer-No Net" (solid, remove dead copper, pour order 64): 17 vertices, not listed, extent 1080,834.46 1377.95,1291.34
P3V3 on Top Layer "Top Layer-No Net" (solid, remove dead copper, pour order 69): 25 vertices, not listed, extent 1417.32,834.46 1889.76,1401.57
NetC14_1 on Top Layer "Top Layer-No Net" (solid, remove dead copper, pour order 72): 1300,440 1355,440 1371.02,440 1377.95,433.07 1377.95,12.95 1365,0 1095,0 1080,15 1080,265 1095,280 1245,280 1290,325 1290,405 1290,435 1295,440
P5V0 on Top Layer "Top Layer-No Net" (solid, remove dead copper, pour order 78): 27 vertices, not listed, extent 1417.32,0 1915,550
VBAT on Top Layer "Top Layer-No Net" (solid, remove dead copper, pour order 82): 2110,1350.39 2389.61,1350.39 2390,1350 2395,1350 2395,1345 2395,1315 2390,1310 2305,1310 2290,1295 2290,1179.29 2280,1169.29 1971.81,1169.29 1960,1181.1 1960,1335.39 1975,1350.39
NetC9_1 on Top Layer "Top Layer-No Net" (solid, remove dead copper, pour order 83): 2330,1295 2385,1295 2395,1295 2405,1285 2405,850 2390,835 2055,835 2045,845 2045,1135 2055.67,1145.67 2281.69,1145.67 2311.02,1175 2311.02,1286.02 2320,1295
CPU-3V3 on Top Layer "Top Layer-No Net" (solid, remove dead copper, pour order 87): 24 vertices, not listed, extent 2435,834.46 2855,1400
VBAT on Top Layer "Top Layer-No Net" (solid, remove dead copper, pour order 88): 20 vertices, not listed, extent 1960,385 2395,625
NetC20_1 on Top Layer "Top Layer-No Net" (solid, remove dead copper, pour order 89): 2326.77,440 2389.61,440 2405,424.61 2405,15 2390,0 2065,0 2050,15 2050,340 2065,355 2285,355 2300,370 2305,375 2305,401.57 2305,435 2310,440
12V-CAM on Top Layer "Top Layer-No Net" (solid, remove dead copper, pour order 93): 30 vertices, not listed, extent 2435,0 3205,550
P3V3 on Top Layer "Top Layer-No Net" (solid, remove dead copper, pour order 97): 7070,3160 7115,3160 7115,3075 7115,3040 7110,3035 7035,3035 7030,3040 7030,3120
GPS-PWR on Top Layer "Top Layer-No Net" (solid, remove dead copper, pour order 98): 23 vertices, not listed, extent 6955,3210 7167.5,3515
P3V3 on Top Layer "Top Layer-No Net" (solid, remove dead copper, pour order 99): 5745,1790 5808.58,1790 5838.02,1790 5845,1783.02 5845,1639.92 5838.94,1633.86 5721.14,1633.86 5715,1640 5715,1784.87 5720.13,1790
P1V8 on Top Layer "Top Layer-No Net" (solid, remove dead copper, pour order 100): 20 vertices, not listed, extent 5715,1365 6050,1790
TOUCH-3V3 on Top Layer "Top Layer-No Net 1" (solid, remove dead copper, pour order 101): 6325,1805 6340,1790 6395,1790 6405,1790 6405,1750 6405,1710 6395,1700 6310,1700 6269.4,1700 6259.4,1710 6259.4,1789.4 6275,1805
P3V3 on Top Layer "Top Layer-No Net 1" (solid, remove dead copper, pour order 102): 6314.69,1840 6334.65,1840 6350,1840 6365,1855 6370,1860 6385,1860 6399.13,1860 6405.51,1866.38 6405.51,1924.49 6400,1930 6330,1930 6305,1905 6298.77,1898.77 6298.77,1840
CAM1-PWR on Top Layer "Top Layer-No Net 1" (solid, remove dead copper, pour order 105): 5520,250 5575,250 5580,250 5585,245 5585,120 5580,115 5500,115 5495,120 5495,245 5500,250
CAM1-PWR on Top Layer "Top Layer-No Net 1" (solid, remove dead copper, pour order 107): 5765,250 5800,250 5810,250 5820,240 5820,149.61 5820,125 5820,120 5815,115 5735,115 5730,120 5730,243.78 5736.22,250
VGND2 on Top Layer "Top Layer-No Net 1" (solid, remove dead copper, pour order 110): 5890,185 5925,185 5938.23,185 5944.88,178.35 5944.88,175 5944.88,119.88 5940,115 5845,115 5840,120 5840,180 5845,185
VGND2 on Internal Plane 1 (split plane): 6574.9,3873.3 6094.78,3873.3 6094.78,3983.2 6094.39,3985.16 6093.29,3986.81 6091.64,3987.91 6089.69,3988.3 5984.78,3988.3 5984.78,4064.9 6574.9,4064.9
VGND1 on Internal Plane 1 (split plane): 19 vertices, not listed, extent 5985.1,3180.1 6554.9,3404.9
AGND2 on Internal Plane 1 (split plane): 37 vertices, not listed, extent 5255.1,95.1 6019.9,1199.9
AGND1 on Internal Plane 1 (split plane): 50 vertices, not listed, extent 4660.1,95.1 5269.9,1744.9
GND on Internal Plane 1 (split plane): 81 vertices, not listed, extent -118.07,-118.07 8070.83,4133.82
12V-CAM on Internal Plane 2 (split plane): 5069.9,115 5069.9,-118.03 2939.78,-118.03 2939.78,-91.81 2939.78,144.41 2939.78,227.09 2939.78,357.86 3660,357.86 3660,25 4420,25 4420,357.86 5069.9,357.86
CPU-3V3 on Internal Plane 2 (split plane): 32 vertices, not listed, extent 2468.56,1084.89 3424.91,3029.91
P5V0 on Internal Plane 2 (split plane): 123 vertices, not listed, extent 1530,-118.03 7099.91,2694.64
CELL-3V3 on Internal Plane 2 (split plane): 2329.9,1840.1 1260,1840.1 1258.05,1839.71 1256.4,1838.6 1255.29,1836.95 1254.9,1835 1254.9,1765.1 880.1,1765.1 880.1,2364.9 2329.9,2364.9
VBAT on Internal Plane 2 (split plane): 36 vertices, not listed, extent 765,235 2210,1444.79
P3V3 on Internal Plane 2 (split plane): 193 vertices, not listed, extent -118.07,-118.07 8070.83,4133.82

## Keep-outs
Keep-Out Layer:
  the board outline again, w10

## Other copper
Top Layer:
  pour cut-out: 3725,270 4360,270 4360,-215 3725,-215
  pour cut-out: -65,855 300,855 300,708.66 95,708.66 95,585 50,540 -25,540 -65,580
  pour cut-out: 3724.41,645.67 4465,645.67 4465,405 3724.41,405
Bottom Layer:
  rectangle net BL-LED-: 6580,2230 6610,2345
  pour cut-out: 3724.41,645.67 4358.27,645.67 4358.27,-157.48 3724.41,-157.48
Internal Plane 1 (plane layer: these items are gaps in the copper):
  rectangle: -118.11,704.72 311.02,862.2
  lines w10: 4705,1750 5275,1750 5275,1055 5160,1055 5160,842.52 5205,842.52 5205,670 5110,670 5110,280 5220,280 5220,90 5025,90 5025,875 4760,875 4760,1086.62 4938.38,1086.62 4940,1085 4940,1455 4655,1455 4655,1750 4740,1750 ; 6189.69,3868.2 6580,3868.2 6580,4070 5979.69,4070 5979.69,3983.2 6089.69,3983.2 6089.69,3868.2 6204.69,3868.2 ; 5250,90 5520,90 5520,760 5575,760 5905,760 5905,935 6025,935 6025,1205 5660,1205 5660,940 5285,940 5285,842.52 5285,655 5410,655 5410,281.95 5408.05,280 5250,280 5250,90 ; 5980,3290.31 5980,3369.69 5980.31,3370 6350,3370 6350,3409.06 6350.94,3410 6559.06,3410 6560,3409.06 6560,3370 6560,3175 6089.69,3175 6089.69,3289.69 6090,3290 5980.31,3290 5980,3290.31
Internal Plane 2 (plane layer: these items are gaps in the copper):
  rectangle: 2155,585 2445,870
  rectangle: -129.92,-133.86 765,1456.69
  rectangle: 1165.35,875 1393.99,1074.8
  rectangle: 700.55,-145 1530,235
  rectangle: 2210,855 2450,1465
  rectangle: 745,190 875,315
  rectangle: 3660,25 4420,377.95
  lines w10: 875,1760 1172.56,1760 1260,1760 1260,1835 2335,1835 2335,2370 875,2370 875,1760
  lines w20: 1413.39,1074.8 1716.54,1074.8 ; 2410,1472.14 2412.86,1475 2716.54,1475 2716.54,1653.24 2716.54,2535.43 2995,2535.43 2995,3040 3435,3040 3435,2082.68 3401.57,2082.68 ; 2448.82,1074.8 3031.5,1074.8 3031.5,1437.01 3031.5,2082.68 3614.17,2082.68 3614.17,2704.72 6842.52,2704.72 7110,2704.72 7110,1338.58 6015.75,1338.58 6015.75,1106.3 5295,1106.3 5295,1210 5062.99,1210 5062.99,1456.69 5669.29,1456.69 5669.29,1614.17 6495,1614.17 6495,2366.14 3937.01,2366.14 3937.01,1618.11 ; 3460.63,385.75 3460.63,551.18 3460.63,1027.56 3460.63,1103.69 3460.63,1417.32 3937.01,1417.32 3937.01,1649.61
  lines w39.37: -153.54,1464.57 1185.04,1464.57 1185.04,1074.8 1925.2,1074.8 1925.2,1464.57 2448.82,1464.57 2448.82,588.82 ; 700.79,-157.48 700.79,1464.57 ; 1409.45,-157.48 1413.39,-153.54 ; 2920,-145 2920,-91.81 2920,144.41 2920,227.09 2920,377.95 3307.09,377.95
  lines w40: 1410,-145 1413.39,-141.61 1413.39,93.39 1690,370 1753.07,433.07 2170,433.07 2173.23,436.3 2173.23,585 2445,585 2448.82,588.82 ; 2925,377.95 5090,377.95 ; 5086.08,-155 5090,-151.08 5090,377.95 ; 5090,115 5090,377.95

## Silkscreen, mask and mechanical layers (free items; w line width, h text height)
Top Overlay:
  lines w6: 4110,950 4205,950 4330,950 4330,809.45 4030,809.45 4030,950 4120,950
Bottom Overlay:
  lines w7.87: 3575,1320 3840,1320 3840,925 3480.12,925 3480,925.12 3480,1320 3590,1320
Mechanical 1:
  lines w0.39: 6023.62,1653.54 6023.62,1811.02 6377.95,1811.02 6377.95,1653.54 6023.62,1653.54 ; 6377.95,2125.98 6377.95,2283.46 7244.09,2283.46 7244.09,2125.98 6377.95,2125.98

## Text inside footprints (layer, text, board x,y; h text height)
J9: Top Overlay "1" at 1362.2,1779.53 h39.37; Top Overlay "2" at 1325,2190 h39.37; Top Overlay "52" at 2325,2186.06 h39.37; Top Overlay "51" at 2259.84,1779.53 h39.37